# Altium PCB DebugBoard.PcbDoc
Units mm, origin at the board's own origin, x right, y up, seen from the top; angles counter-clockwise.
Board outline 46 x 38.5 mm, 4 copper layers (Top Layer, Ground 1, Ground 2, Bottom Layer), stack 2.12 mm thick; 26 components, 28 nets, 117 pads, 0 vias.
Unrouted connection lines stored in the file: 71.
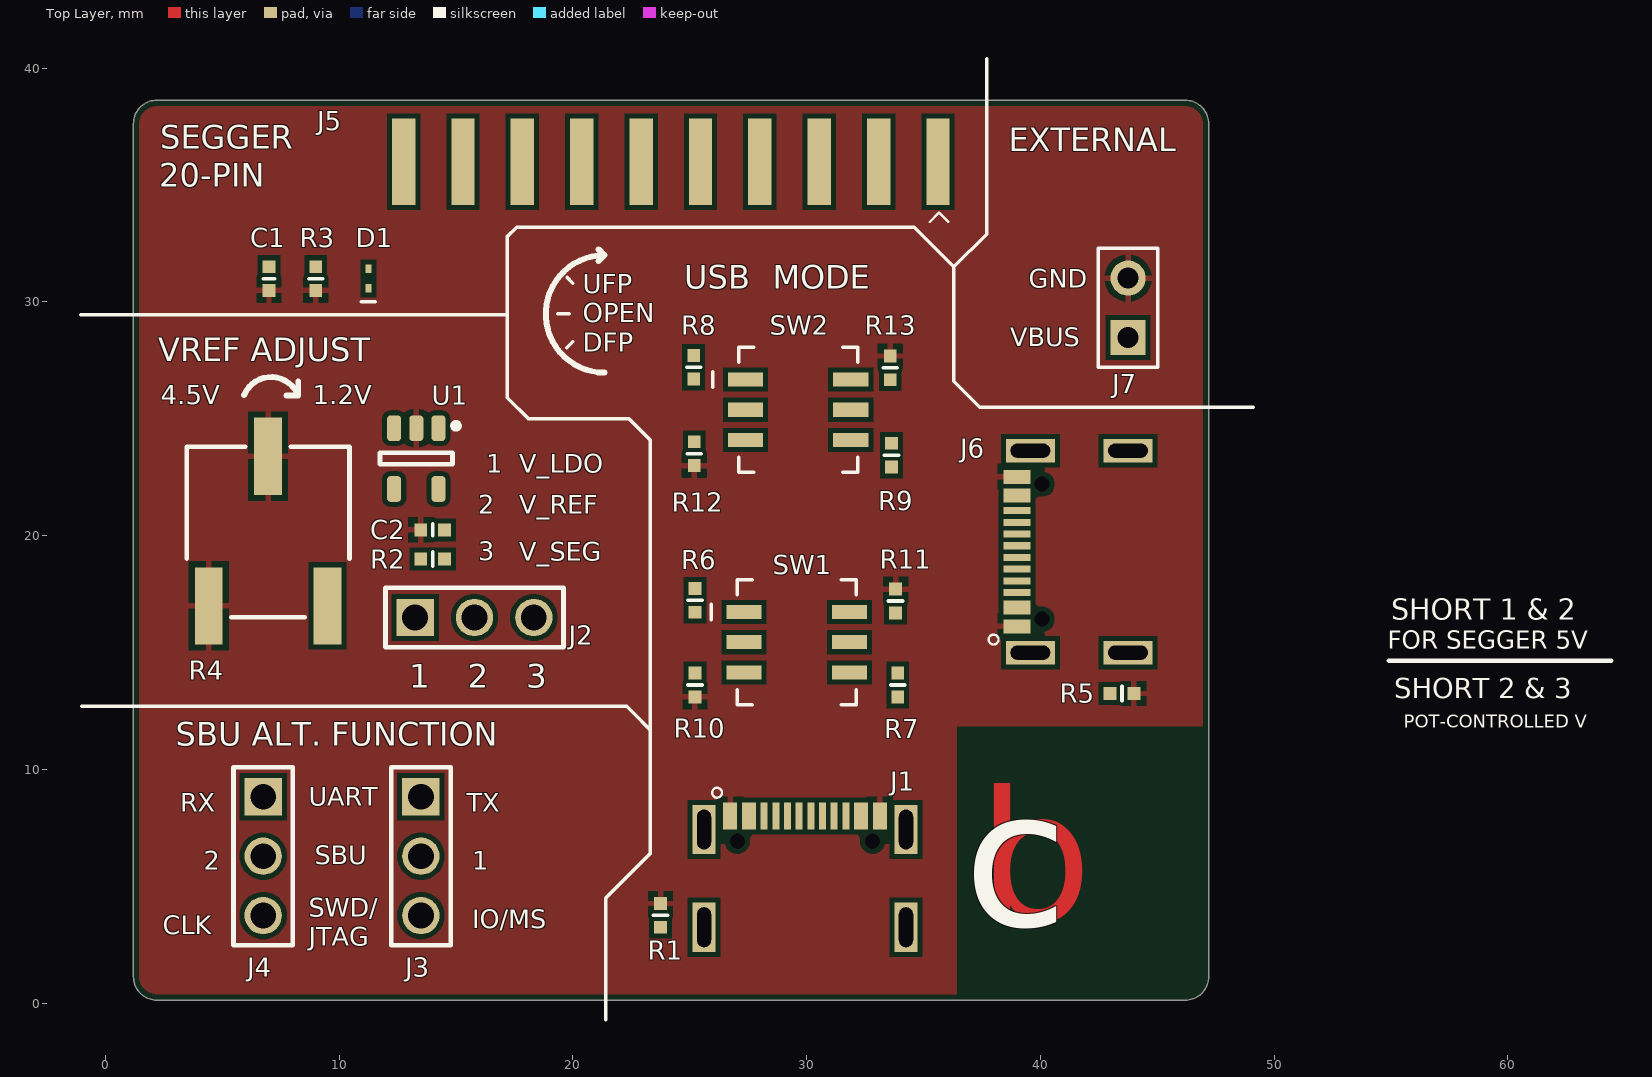
[diagram p0: Top Layer view]
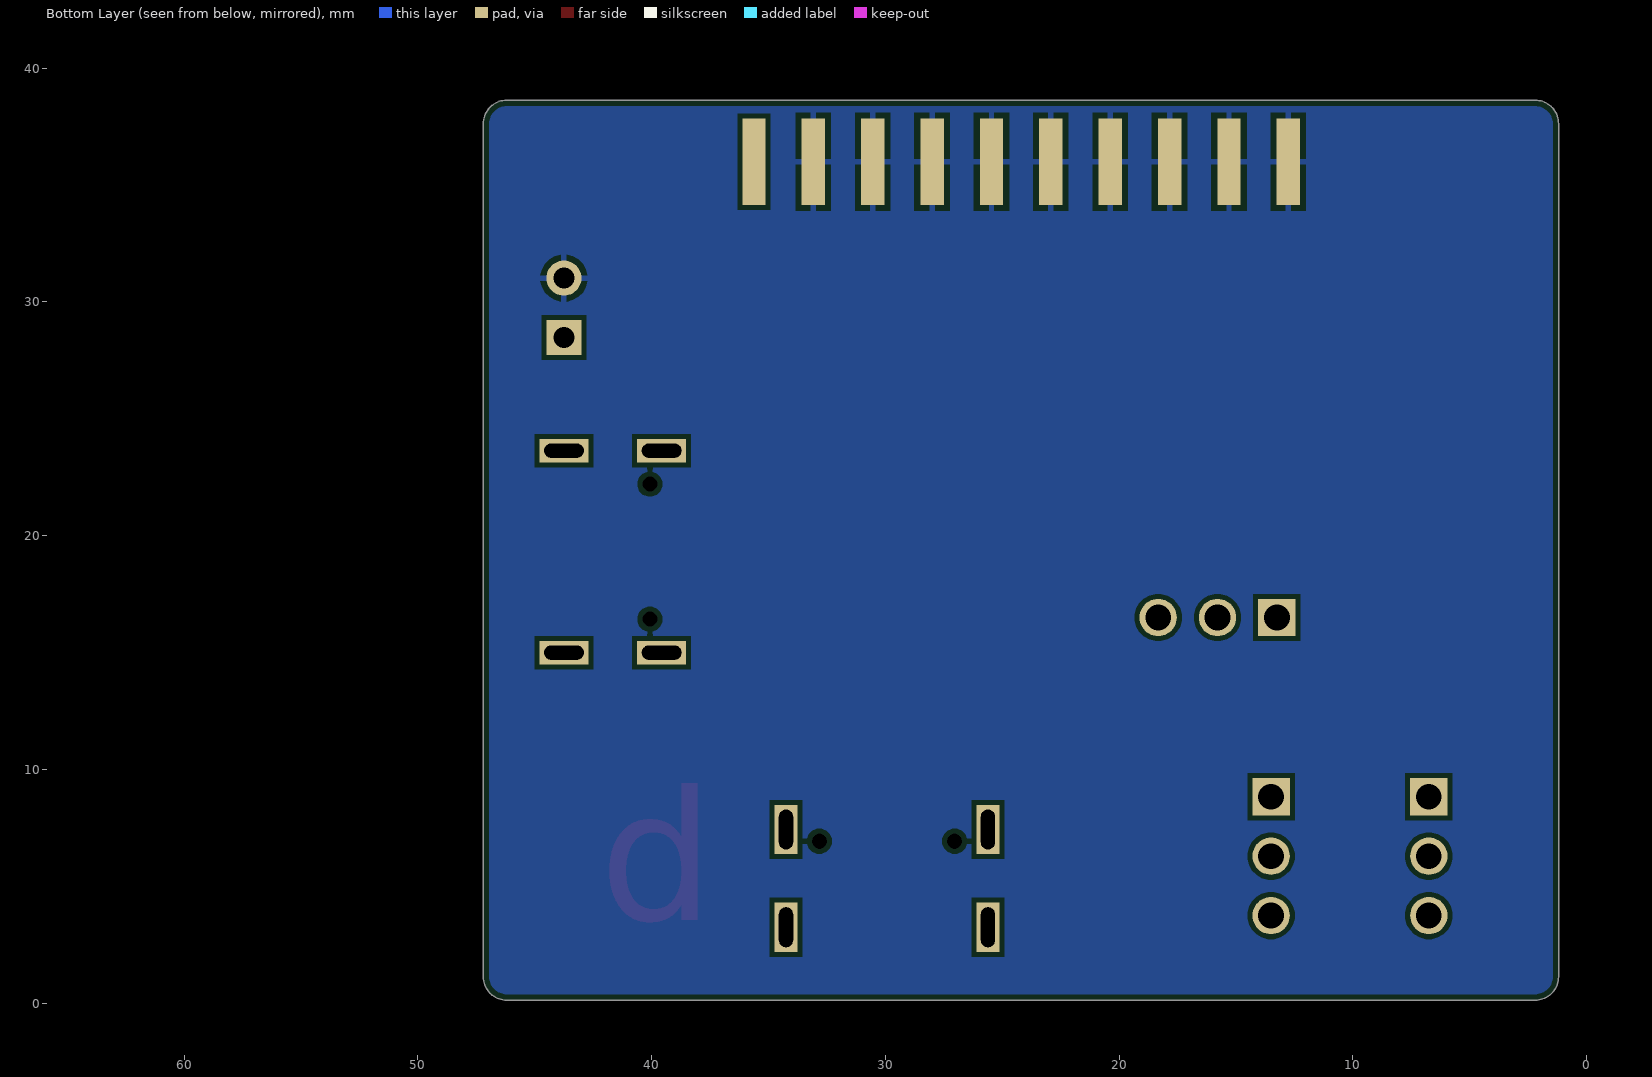
[diagram p1: Bottom Layer view, seen from below]
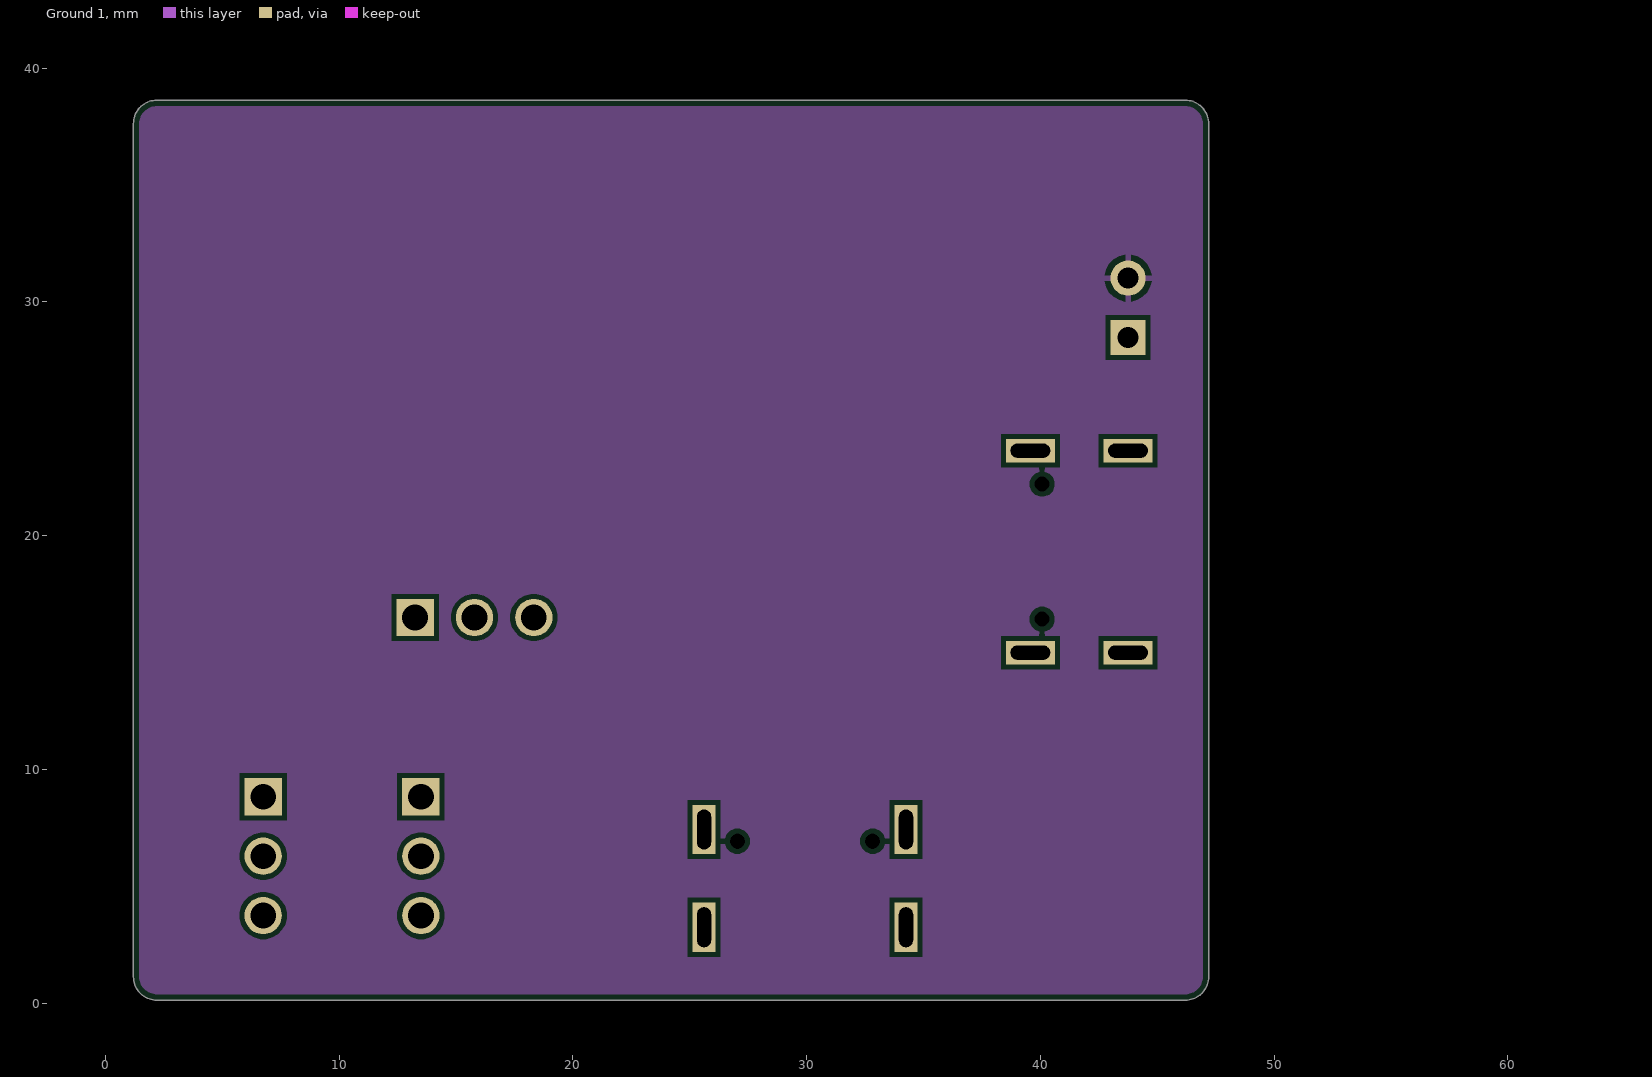
[diagram p2: Ground 1]
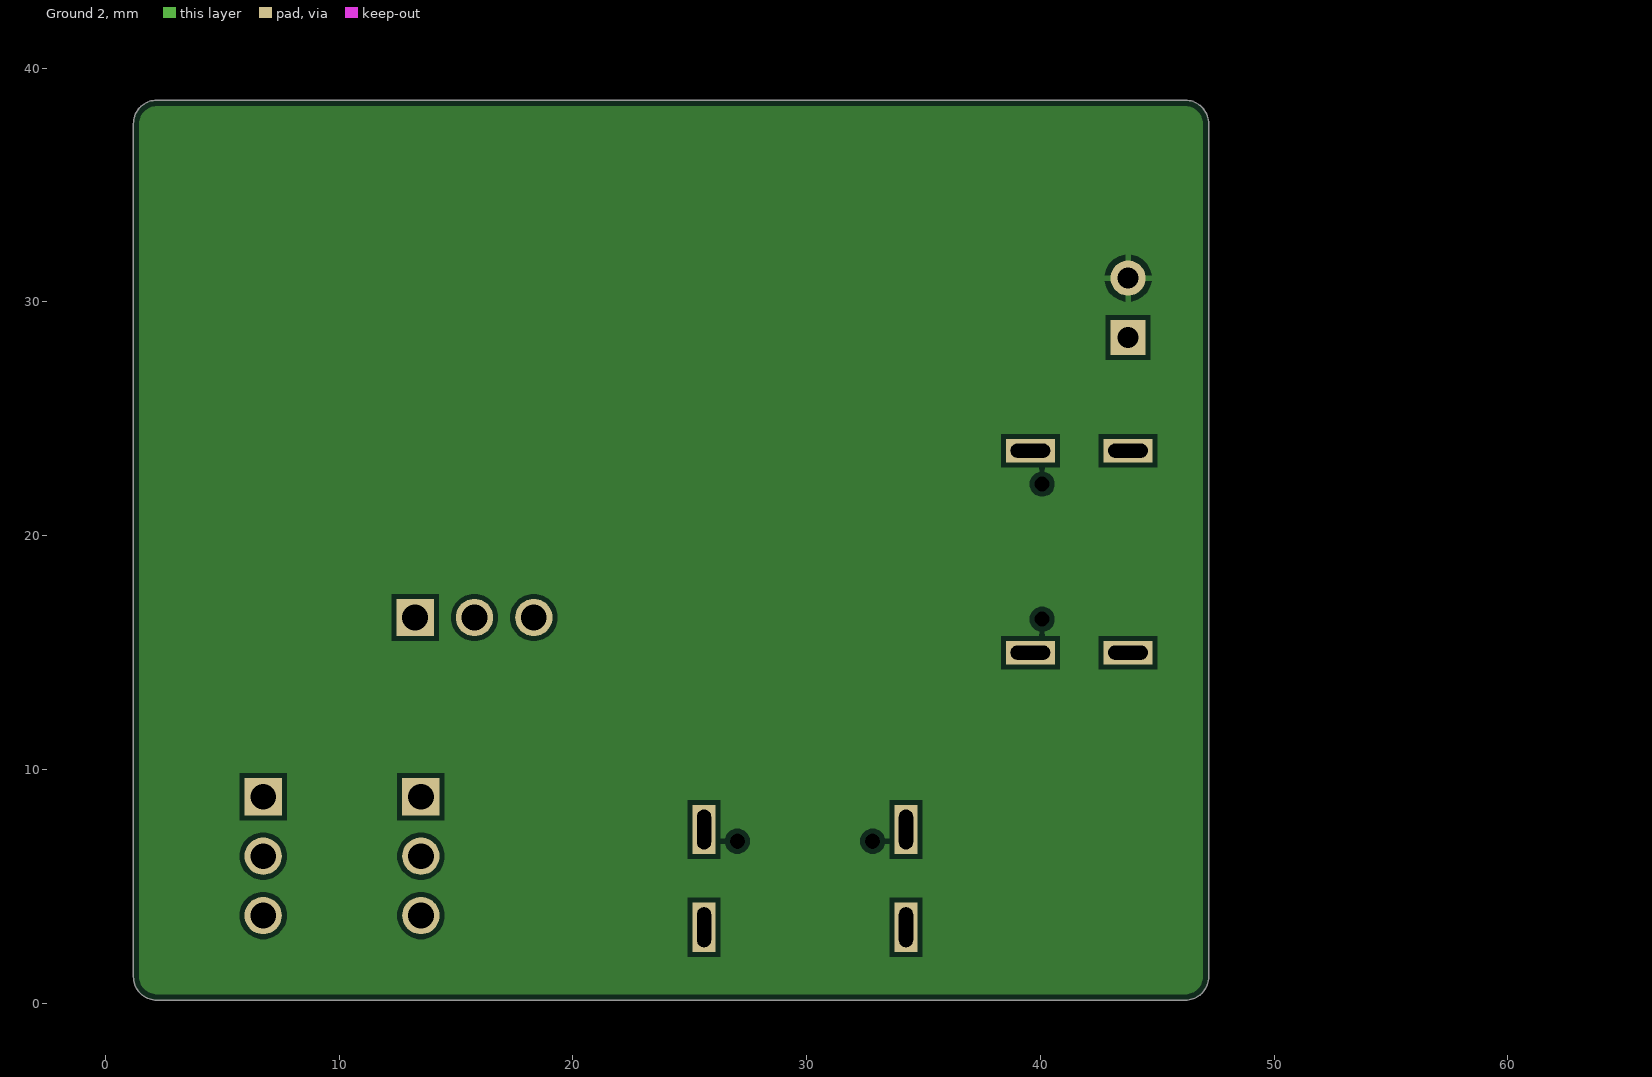
[diagram p3: Ground 2]

## Layer stack, top to bottom
Top Solder: solder mask 0.01, Solder Resist, Dk 3.5
Top Layer: signal copper 0.036
Dielectric 2: prepreg 0.1, PP-006, Dk 4.1
Ground 1: signal copper 0.036
Dielectric 1: dielectric 1.776, FR-4, Dk 4.8
Ground 2: signal copper 0.036
Dielectric 3: prepreg 0.1, PP-006, Dk 4.1
Bottom Layer: signal copper 0.036
Bottom Solder: solder mask 0.01, Solder Resist, Dk 3.5

## Board outline
1.2,1.13 1.2,37.63 cw(c2.2,37.63) 2.2,38.63 46.2,38.63 cw(c46.2,37.63) 47.2,37.63 47.2,1.13 cw(c46.2,1.13) 46.2,0.13 2.2,0.13 cw(c2.2,1.13)

## Design rules (kind name [scope] priority, off if disabled: settings)
BoardOutlineClearance [All] p1: gap=0.254 ignorepadtopadclearanceinfootprint=FALSE
Clearance Clearance_1 [InNet('D_N') vs InNet('D_P')] p1: gap=0.127 ignorepadtopadclearanceinfootprint=TRUE
Clearance [All] p2: gap=0.204 ignorepadtopadclearanceinfootprint=TRUE except(0.2: SMDPad-SMDPad)
DiffPairsRouting [All] p1: maxlimit=0.254 minlimit=0.064 mostfreqgap=0.127 toplayer_minwidth=0.178 toplayer_maxwidth=0.457 toplayer_prefwidth=0.457 midlayer1_minwidth=0.381 midlayer1_maxwidth=0.381 midlayer1_prefwidth=0.381 midlayer2_minwidth=0.381 midlayer2_maxwidth=0.381 midlayer2_prefwidth=0.381 bottomlayer_minwidth=0.178 bottomlayer_maxwidth=0.457 bottomlayer_prefwidth=0.457 impedanceprofiledriven=TRUE maxuncoupledlength=12.7
HoleSize [All] p1: absolutevalues=TRUE maxlimit=5 minlimit=0.153 maxpercent=80.000 minpercent=20.000
MinimumSolderMaskSliver [All] p1: minsoldermaskwidth=0.025
PolygonConnect [All] p1: thpad.connectstyle=Relief thpad.reliefconductorwidth=0.254 thpad.reliefentries=4 thpad.polygonreliefangle="90 Angle" thpad.airgapwidth=0.254 smdpad.connectstyle=Relief smdpad.reliefconductorwidth=0.254 smdpad.reliefentries=4 smdpad.polygonreliefangle="90 Angle" smdpad.airgapwidth=0.254 via.connectstyle=Direct via.reliefconductorwidth=0.254 via.reliefentries=4 via.polygonreliefangle="90 Angle" via.airgapwidth=0.254
RoutingVias [All] p1: holewidth=0.305 width=0.61 viastyle="Through Hole" minholewidth=0.254 minwidth=0.508 maxholewidth=0.5 maxwidth=1.27
SilkToSolderMaskClearance [IsPad] p1: minsilkscreentomaskgap=0.025 clearancetoexposedcopper=TRUE
SolderMaskExpansion [All] p1: expansion=0.102 istentingtop=FALSE
SupplyNets "Schematic Supply Nets" [InNet('VBUS')] p1: voltage=0.000
SupplyNets "Schematic Supply Nets_5" [InNet('V_DUTVREF')] p2: voltage=0.000
SupplyNets "Schematic Supply Nets_4" [InNet('V_FAKEVREF')] p3: voltage=0.000
SupplyNets "Schematic Supply Nets_3" [InNet('GND')] p4: voltage=0.000
SupplyNets "Schematic Supply Nets_1" [InNet('VSRC_SEGGER')] p5: voltage=0.000
Width [All] p1: maxlimit=25.4 minlimit=0.204 preferedwidth=0.254 midlayer1_maxwidth=0.254 midlayer2_maxwidth=0.254 minimp=50.000000 maximp=50.000000 favimp=50.000000
26 further rules are at their usual default settings.

## Classes and differential pairs
differential pair D: +D_P -D_N

## Components (designator, comment, footprint, x,y, rotation, side; value= is the part's Value field where it differs from the comment)
C1 "0402ZD105KAT2A" CAP-0402 7,31 r90 top
C2 "0402ZD105KAT2A" CAP-0402 14,20.25 r0 top
D1 "NZ9F12VST5G" DIODE-SOD923 11.25,31 r270 top
J1 "USB4105" CONN-USBC-GCT_USB4105 29.93,8.005 r0 top
J2 "61300311121" HDR-V-1X3 15.79,16.5 r0 top
J3 "61300311121" HDR-V-1X3 13.5,6.29 r270 top
J4 "61300311121" HDR-V-1X3 6.75,6.29 r270 top
J5 "SFH11-PBPC-D10-ST-BK" HDR-V-2X10-F-2.54MM 24.19,37 r0 top
J6 "USB4105" CONN-USBC-GCT_USB4105 38.995,19.32 r90 top
J7 "61300211121" HDR-V-1X2 43.75,29.75 r90 top
R1 "RC0402FR-070RL" RES-0402 23.75,3.758 r270 top value=0Ω
R2 "RC0402FR-0710KL" RES-0402 14,19 r0 top value=10kΩ
R3 "RES-470K-0402" RES-0402 9,31 r270 top value=470kΩ
R4 "POT-ROT-100K-SMD" 3361P-1-104GLF 6.96,20.2 r0 top
R5 "RC0402FR-070RL" RES-0402 43.492,13.25 r180 top value=0Ω
R6 "ERJ2GEJ563X" RES-0402 25.222,17.233 r270 top value=56k
R7 "ERJ2GEJ563X" RES-0402 33.896,13.613 r90 top value=56k
R8 "ERJ2GEJ563X" RES-0402 25.167,27.204 r270 top value=56k
R9 "ERJ2GEJ563X" RES-0402 33.626,23.445 r90 top value=56k
R10 "ERJ2GEJ512X" RES-0402 25.222,13.613 r90 top value=5.1k
R11 "ERJ2GEJ512X" RES-0402 33.807,17.207 r270 top value=5.1k
R12 "ERJ2GEJ512X" RES-0402 25.193,23.508 r90 top value=5.1k
R13 "ERJ2GEJ512X" RES-0402 33.575,27.179 r270 top value=5.1k
SW1 "CS-4-22YTA" SW-BCD-CS-4-22YTA 29.578,15.442 r0 top
SW2 "CS-4-22YTA" SW-BCD-CS-4-22YTA 29.638,25.388 r0 top
U1 "RT9043GB" SOT-23-5 13.3,23.3 r270 top

## Footprints (in the part's own frame and the unit in brackets; to place one, negate y for a bottom-side part, rotate by r counter-clockwise, add the part's x,y. Pads: shape width x height; smd on the part's side, far side on the other; paste and mask are expansions set on the pad)
3361P-1-104GLF [mm]
  rect 1.19x3.3 smd paste+0 mask+0: 1(-2.54,-3.2) 2(0,3.2) 3(2.54,-3.2)
  silkscreen extent -3.48,-3.69 3.48,3.6, body extent -3.58,-4.95 3.58,4.95, height 0.25
CAP-0402 [mm]
  rect 0.55x0.55 smd: 1(-0.508,0) 2(0.508,0)
  silkscreen extent 0,-0.25 0,0.25, body extent -0.5,-0.25 0.5,0.25, height 0.5
CONN-USBC-GCT_USB4105 [mm]
  rect 0.6x1.15 smd: A1(-3.2,0) A4(-2.4,0) A9(2.4,0) A12(3.2,0)
  rect 0.3x1.15 smd: A5(-1.25,0) A6(-0.25,0) A7(0.25,0) A8(1.25,0) B5(1.75,0) B6(0.75,0) B7(-0.75,0) B8(-1.75,0)
  rect 1x2.1 hole 0.6 slot 1.7 at 90 deg: ME(-4.32,-4.755) ME(-4.32,-0.575) ME(4.32,-4.755) ME(4.32,-0.575)
  round 0.4 hole 0.65 unplated: ""(-2.89,-1.075) ""(2.89,-1.075)
  silkscreen extent -3.97,0.79 -3.55,1.21, body extent -4.47,-7.35 4.47,0.35, height 3.26
DIODE-SOD923 [mm]
  rect 0.36x0.25 smd: 1(0.42,0) 2(-0.42,0)
  silkscreen extent 1,-0.3 1,0.3, body extent -0.53,-0.32 0.52,0.32, height 0.43
HDR-V-1X2 [mm]
  rect 1.5x1.5 hole 0.9: 1(-1.27,0)
  round 1.5 hole 0.9: 2(1.27,0)
  silkscreen extent -2.54,-1.27 2.54,1.27, body extent -2.54,-1.27 2.54,1.27, height 8.55
HDR-V-1X3 [mm]
  rect 1.6x1.6 hole 1.1: 1(-2.54,0)
  round 1.6 hole 1.1: 2(0,0) 3(2.54,0)
  silkscreen extent -3.81,-1.27 3.81,1.27, body extent -3.81,-1.27 3.81,1.27, height 8.55
HDR-V-2X10-F-2.54MM [mm]
  rect 1x3.7 smd: 1(11.43,-1) 3(8.89,-1) 5(6.35,-1) 7(3.81,-1) 9(1.27,-1) 11(-1.27,-1) 13(-3.81,-1) 15(-6.35,-1) 17(-8.89,-1) 19(-11.43,-1)
  rect 1x3.7 smd far side: 2(11.43,-1) 4(8.89,-1) 6(6.35,-1) 8(3.81,-1) 10(1.27,-1) 12(-1.27,-1) 14(-3.81,-1) 16(-6.35,-1) 18(-8.89,-1) 20(-11.43,-1)
  silkscreen extent 11.08,-3.58 11.88,-3.18, body extent -15.16,-1.8 15.16,9.9, height 3.04
RES-0402 [mm]
  rect 0.55x0.55 smd: 1(-0.508,0) 2(0.508,0)
  silkscreen extent 0,-0.3 0,0.3, body extent -0.58,-0.27 0.57,0.27, height 0.41
SOT-23-5 [mm] "SOT23-5, 5pin, 3mm x 3mm, 0.95 pitch"
  rrect50% 1.1x0.6 smd: 1(-1.3,0.95) 2(-1.3,0) 3(-1.3,-0.95) 4(1.3,-0.95) 5(1.3,0.95)
  silkscreen extent -1.52,-1.55 0.25,1.83, body extent -1.23,-1.5 1.27,1.5, height 1.1
SW-BCD-CS-4-22YTA [mm] "DPDT Rotary Switch"
  rect 1.5x0.6 smd: 1(-2.25,1.3) 2(-2.25,0) 3(-2.25,-1.3) 4(2.25,1.3) 5(2.25,0) 6(2.25,-1.3)
  silkscreen extent -3.66,-2.67 2.54,2.67, body extent -2.6,-2.5 2.6,2.5, height 2.32

## Part data
C1 C2: library part CAP-1uF-10V-0402, "AVX - 0402ZD105KAT2A - SMD Multilayer Ceramic Capacitor, 1 µF, 10 V, 0402 [1005 Metric], ± 10%, X5R, AVX 0402 MLCC", Capacitance=1uF, Case Code (Imperial)=0402, Case Code (Metric)=1005, Dielectric=X5R, Dielectric Material=Ceramic, Manufacturer 1="Kyocera AVX", Max Operating Temperature=85°C, Min Operating Temperature=-55°C, Package Quantity=1, Supplier Part Number 1=478-4596-1-ND, Tolerance=10%, Voltage=10V, Case/Package=0402, Category="Ceramic Capacitors", ComponentLink1Description=https://datasheet.ciiva.com/151/cx5r-151901.pdf?src-supplier=Digi-Key, ComponentLink1URL=https://datasheet.ciiva.com/151/cx5r-151901.pdf?src-supplier=Digi-Key, ComponentLink2Description=https://datasheet.ciiva.com/151/cx5r-151902.pdf?src-supplier=Digi-Key, ComponentLink2URL=https://datasheet.ciiva.com/151/cx5r-151902.pdf?src-supplier=Digi-Key, ComponentLink3Description=https://datasheet.ciiva.com/151/cx5r-151903.pdf?src-supplier=Digi-Key, ComponentLink3URL=https://datasheet.ciiva.com/151/cx5r-151903.pdf?src-supplier=Digi-Key, ComponentLink4Description=https://datasheet.ciiva.com/11464/cx5r-11464568.pdf?src-supplier=Avnet, ComponentLink4URL=https://datasheet.ciiva.com/11464/cx5r-11464568.pdf?src-supplier=Avnet, ComponentLink5Description=https://datasheet.ciiva.com/6159/lt-6159749.pdf?src-supplier=Farnell, ComponentLink5URL=https://datasheet.ciiva.com/6159/lt-6159749.pdf?src-supplier=Farnell, ComponentLink6Description=https://datasheet.ciiva.com/1124/1666675-1124066.pdf?src-supplier=Element14, ComponentLink6URL=https://datasheet.ciiva.com/1124/1666675-1124066.pdf?src-supplier=Element14, ComponentLink7Description=https://datasheet.ciiva.com/1124/1666675-1124067.pdf?src-supplier=Element14, ComponentLink7URL=https://datasheet.ciiva.com/1124/1666675-1124067.pdf?src-supplier=Element14, ComponentLink8Description=https://datasheet.ciiva.com/16448/cx5r-16448997.pdf?src-supplier=Future+Electronics, ComponentLink8URL=https://datasheet.ciiva.com/16448/cx5r-16448997.pdf?src-supplier=Future+Electronics, Construction=Flat, Contact Plating=Tin,Matte, Depth=0.5mm, Height=0.56mm, Lead Free="Lead Free", Lead Pitch=5.08mm, Length=1mm, Manufacturer Part Number 1=0402ZD105KAT2A, Mount="Surface Mount", Packaging="Cut Tape", Pricing 1="1=0.12000, 10=0.08800, 50=0.05000, 100=0.04140, 500=0.02900, 1000=0.02401, 2500=0.02235, 5000=0.02045 (USD)", Radiation Hardening=No, REACH SVHC="No SVHC", RoHS=Yes, RoHS Compliant=Yes, Series=-, Stock 1=2474650, Supplier 1=Digi-Key, Termination=SMD/SMT, Thickness=0.022inch, Voltage Rating=10V, Voltage Rating (DC)=10V, Width=0.02inch
D1: library part DIODE-ZNR-12V-SOD923, "DIODE ZENER 12V 200MW SOD923", Case/Package=SOD-923-2, Manufacturer 1="ON Semiconductor", Max Operating Temperature=150°C, Max Power Dissipation=200mW, Max Reverse Leakage Current=100nA, Min Operating Temperature=-65°C, Package Quantity=8000, Test Current=5mA, Tolerance=2%, Zener Voltage=12V, Category="Zener Diodes", ComponentLink1Description=https://datasheet.ciiva.com/900/nz9f2v4s-d-900335.pdf?src-supplier=Digi-Key, ComponentLink1URL=https://datasheet.ciiva.com/900/nz9f2v4s-d-900335.pdf?src-supplier=Digi-Key, ComponentLink2Description=https://datasheet.ciiva.com/10639/nz9f2v4s-d-10639037.pdf?src-supplier=Avnet, ComponentLink2URL=https://datasheet.ciiva.com/10639/nz9f2v4s-d-10639037.pdf?src-supplier=Avnet, ComponentLink3Description=https://datasheet.ciiva.com/13082/nz9f2v4s-d-13082447.pdf?src-supplier=Mouser, ComponentLink3URL=https://datasheet.ciiva.com/13082/nz9f2v4s-d-13082447.pdf?src-supplier=Mouser, Element Configuration=Single, Impedance=30R, Lead Free="Lead Free", Manufacturer Part Number 1=NZ9F12VST5G, Number of Pins=2, Packaging="Tape and Reel", Power Dissipation=200mW, Pricing 1="5953=0.05964, 6000=0.05880, 12000=0.05712, 30000=0.05586, 60000=0.05376, 300000=0.05250, 600000=0.05124 (USD)", Radiation Hardening=No, RoHS=Yes, RoHS Compliant=Yes, Stock 1=4479650, Supplier 1=Avnet, Supplier Part Number 1=NZ9F12VST5G, Voltage Tolerance=2%
J1 J6: library part CONN-F-USB-C-GCT_USB4105, "Usb Conn, 2.0 Type C, Rcpt, 16Pos, Smt Rohs Compliant: Yes", Manufacturer 1="Global Connector Technology", Manufacturer Part Number 1=USB4105-GF-A, Supplier Part Number 1=86AH2021, Pricing 1="1=0.85100, 10=0.69300, 25=0.63100, 50=0.58700, 100=0.54000 (USD)", RoHS=No, Stock 1=1960, Supplier 1=Newark
J2 J3 J4: library part HDR-V-1X3-M, "Header, 3-Pin, 0.1\"", Colour=Black, Manufacturer="Wurth Electronics", Supplier Part Number 1=732-5316-ND, ComponentLink1Description=http://www.farnell.com/cad/1737268.pdf, ComponentLink1URL=http://www.farnell.com/cad/1737268.pdf, ComponentLink2Description=http://katalog.we-online.de/em/datasheet/6130xx11121.pdf, ComponentLink2URL=http://katalog.we-online.de/em/datasheet/6130xx11121.pdf, Connector Type="Male Pin", Contact Material=Copper, Contact Mating Length=0.236inch, Contact Plating=Gold, Gender=Male, LatestRevisionDate=17-Jul-2002, LatestRevisionNote="Re-released for DXP Platform.", Lead Free="Lead Free", Manufacturer 1="Wurth Electronics", Manufacturer Part Number 1=61300311121, Mount="Through Hole", MPN=61300311121, Number of Contacts=3, Number of Positions=3, Number of Rows=1, Packaging=Bulk, Pitch=0.1inch, Pricing 1="1=0.13, 10=0.106, 25=0.088, 50=0.074, 100=0.067, 1000=0.061 (USD)", Publisher="Altium Limited", REACH SVHC=Unknown, Stock 1=41782, Supplier 1=Digi-Key, Termination=Solder
J5: library part HDR-V-2X10-F-2.54MM, "20 Position Header Connector 0.100\" (2.54mm) Through Hole Gold", Color=Black, Manufacturer 1=Sullins, Package Quantity=1, Supplier Part Number 1=S9197-ND, Category="Headers and Wire Housings", ComponentLink1Description=https://datasheet.ciiva.com/754/sfh11-pxxc-dxx-st-xx11160-c-754558.pdf?src-supplier=Digi-Key, ComponentLink1URL=https://datasheet.ciiva.com/754/sfh11-pxxc-dxx-st-xx11160-c-754558.pdf?src-supplier=Digi-Key, Connector Type=Header, Contact Plating=Gold, Contact Type="Female Socket", Lead Free="Lead Free", Manufacturer Part Number 1=SFH11-PBPC-D10-ST-BK, Mount="Through Hole", Number of Positions=20, Number of Rows=2, Packaging=Tray, Pitch=0.1inch, Pricing 1="1=1.15000, 10=0.96800, 80=0.86925, 440=0.71118, 1000=0.63216, 5000=0.57070 (USD)", RoHS=Yes, RoHS Compliant=Yes, Row Spacing=0.1inch, Series=SFH11, Stock 1=51703, Supplier 1=Digi-Key, Termination=Solder
J7: library part HDR-V-1X2-M, "Header, 2-Pin, 0.1\"", Colour=Black, Current Rating=3A, Manufacturer="Wurth Electronics", Max Operating Temperature=125°C, Min Operating Temperature=-40°C, Supplier Part Number 1=732-5315-ND, Voltage Rating=250V, ComponentLink1Description=https://datasheet.ciiva.com/13619/6130xx11121-48870-13619345.pdf, ComponentLink1URL=https://datasheet.ciiva.com/13619/6130xx11121-48870-13619345.pdf, Connector Type="Male Pin", Contact Gender=Male, Contact Material="Copper,Copper Alloy", Contact Mating Length=0.236inch, Contact Plating=Gold, Gender=Male, Housing Material=PBT, LatestRevisionDate=17-Jul-2002, LatestRevisionNote="Re-released for DXP Platform.", Lead Free="Lead Free", Manufacturer 1="Wurth Electronics", Manufacturer Part Number 1=61300211121, Mount="Through Hole", MPN=61300211121, Number of Contacts=2, Number of Positions=2, Number of Rows=1, Packaging=Bulk, Pitch=0.1inch, Pricing 1="1=0.13, 10=0.106, 25=0.088, 50=0.074, 100=0.067, 1000=0.061 (USD)", Publisher="Altium Limited", REACH SVHC=Unknown, Stock 1=88010, Supplier 1=Digi-Key, Termination="Through Hole"
R1 R5: library part RES-0-0402, "RES 0 OHM JUMPER 1/16W 0402", Manufacturer=Yageo, Max Operating Temperature=155°C, Min Operating Temperature=-55°C, Package Shape=Rectangular, Rated Power Dissipation (P)=62.5mW, Rated Temperature=70°C, Resistance=0R, Resistor Type="FIXED RESISTOR", Supplier Part Number 1=311-0.0LRTR-ND, Tolerance=Jumper, Category="Chip SMD Resistors", ComponentLink1Description=https://datasheet.ciiva.com:443/pdfs/VipMasterIC/IC/YAGO/YAGOS02562/YAGOS02562-1.pdf?src-supplier=IHS+Markit, ComponentLink1URL=https://datasheet.ciiva.com:443/pdfs/VipMasterIC/IC/YAGO/YAGOS02562/YAGOS02562-1.pdf?src-supplier=IHS+Markit, ComponentLink2Description=https://datasheet.ciiva.com/8896/pyu-rc0402-51-rohs-l-6-8896149.pdf?src-supplier=Avnet, ComponentLink2URL=https://datasheet.ciiva.com/8896/pyu-rc0402-51-rohs-l-6-8896149.pdf?src-supplier=Avnet, ComponentLink3Description=https://datasheet.ciiva.com/16790/pyu-rc0402-51-rohs-l-6-r-16790444.pdf?src-supplier=Future+Electronics, ComponentLink3URL=https://datasheet.ciiva.com/16790/pyu-rc0402-51-rohs-l-6-r-16790444.pdf?src-supplier=Future+Electronics, ComponentLink4Description=https://datasheet.ciiva.com/28419/pyu-rc0402-51-rohs-l-6-28419661.pdf?src-supplier=Avnet+Europe, ComponentLink4URL=https://datasheet.ciiva.com/28419/pyu-rc0402-51-rohs-l-6-28419661.pdf?src-supplier=Avnet+Europe, ComponentLink5Description=https://datasheet.ciiva.com/16869/pyu-rc0402-51-rohs-l-6-16869518.pdf?src-supplier=Avnet+Europe, ComponentLink5URL=https://datasheet.ciiva.com/16869/pyu-rc0402-51-rohs-l-6-16869518.pdf?src-supplier=Avnet+Europe, JESD-609 Code=e3, Manufacturer 1=Yageo, Manufacturer Part Number=RC0402FR-070RL, Manufacturer Part Number 1=RC0402FR-070RL, Manufacturer_PN=RC0402FR-070RL, Mount="Surface Mount", Number of Pins=2, Packaging="Tape and Reel", Pricing 1="10000=0.00132, 30000=0.00116, 50000=0.00109 (USD)", REACH SVHC=Yes, RoHS=Yes, RoHS Compliant=Yes, Size Code=0402, Stock 1=2669862, Supplier 1=Digi-Key, Technology="METAL GLAZE/THICK FILM", Terminal Finish=Nickel, Termination=Wraparound
R2: library part RES-10K-0402, "RES SMD 10K OHM 1% 1/16W 0402", Case Code (Imperial)=0402, Case Code (Metric)=1005, Manufacturer 1=Yageo, Max Operating Temperature=155°C, Min Operating Temperature=-55°C, Power Rating=62.5mW, Resistance=10kR, Supplier Part Number 1=311-10.0KLRCT-ND, Temperature Coefficient=100ppm/°C, Tolerance=±1%, Voltage Rating=50V, Case/Package=0402, ComponentLink1Description=https://datasheet.ciiva.com/7660/38568-7660787.pdf?src-supplier=Element14, ComponentLink1URL=https://datasheet.ciiva.com/7660/38568-7660787.pdf?src-supplier=Element14, ComponentLink2Description=https://datasheet.ciiva.com/7849/1784430-7849813.pdf?src-supplier=Element14, ComponentLink2URL=https://datasheet.ciiva.com/7849/1784430-7849813.pdf?src-supplier=Element14, ComponentLink3Description=https://datasheet.ciiva.com/7849/1686128-7849814.pdf?src-supplier=Element14, ComponentLink3URL=https://datasheet.ciiva.com/7849/1686128-7849814.pdf?src-supplier=Element14, ComponentLink4Description=https://datasheet.ciiva.com/7849/1784430-7849815.pdf?src-supplier=Element14, ComponentLink4URL=https://datasheet.ciiva.com/7849/1784430-7849815.pdf?src-supplier=Element14, ComponentLink5Description=https://datasheet.ciiva.com/22747/1018594-22747512.pdf?src-supplier=Element14, ComponentLink5URL=https://datasheet.ciiva.com/22747/1018594-22747512.pdf?src-supplier=Element14, ComponentLink6Description=https://datasheet.ciiva.com/12667/pyu-rc0402-51-rohs-l-6-r-12667067.pdf?src-supplier=Mouser, ComponentLink6URL=https://datasheet.ciiva.com/12667/pyu-rc0402-51-rohs-l-6-r-12667067.pdf?src-supplier=Mouser, ComponentLink7Description=https://datasheet.ciiva.com/7983/1018594-7983486.pdf?src-supplier=Element14, ComponentLink7URL=https://datasheet.ciiva.com/7983/1018594-7983486.pdf?src-supplier=Element14, Composition="Thick Film", Depth=0.5mm, Height=0.32mm, Lead Free="Lead Free", Lead Pitch=0.2mm, Length=1mm, Manufacturer Part Number 1=RC0402FR-0710KL, Military Standard=Not, Number of Pins=2, Number of Terminations=2, Packaging="Tape and Reel", Pricing 1="1=0.10000, 10=0.01500, 100=0.00600, 1000=0.00270, 2500=0.00235, 5000=0.00194 (USD)", REACH SVHC="No SVHC", RoHS=Yes, Stock 1=64327699, Supplier 1=Digi-Key, Termination=SMD/SMT, Voltage Rating (DC)=50V, Width=0.5mm, Working Voltage=50V
R3: library part CMP-041-000094-1, "RES SMD 470K OHM 1% 1/16W 0402", Case Code (Imperial)=0402, Case Code (Metric)=1005, Manufacturer 1=Yageo, Manufacturer Part Number 1=RC0402FR-07470KL, Max Operating Temperature=155°C, Max Power Dissipation=63mW, Min Operating Temperature=-55°C, Package Quantity=1, Power Rating=62.5mW, Resistance=470kR, Resistance Tolerance=1%, Resistor Type="Thick Film", Temperature Coefficient=100ppm/°C, Voltage Rating=50V, Case/Package=0402, Category="Chip SMD Resistors", ComponentLink1Description=https://datasheet.ciiva.com/11819/0900766b80c66297-11819514.pdf?src-supplier=RSComponents, ComponentLink1URL=https://datasheet.ciiva.com/11819/0900766b80c66297-11819514.pdf?src-supplier=RSComponents, ComponentLink2Description=https://datasheet.ciiva.com/2453/pyu-r-int-thick-7-2453433.pdf?src-supplier=Digi-Key, ComponentLink2URL=https://datasheet.ciiva.com/2453/pyu-r-int-thick-7-2453433.pdf?src-supplier=Digi-Key, ComponentLink3Description=https://datasheet.ciiva.com/2453/pyu-r-int-thick-7-2453434.pdf?src-supplier=Digi-Key, ComponentLink3URL=https://datasheet.ciiva.com/2453/pyu-r-int-thick-7-2453434.pdf?src-supplier=Digi-Key, ComponentLink4Description=https://datasheet.ciiva.com/2453/pyu-r-int-thick-7-2453435.pdf?src-supplier=Digi-Key, ComponentLink4URL=https://datasheet.ciiva.com/2453/pyu-r-int-thick-7-2453435.pdf?src-supplier=Digi-Key, ComponentLink5Description=https://datasheet.ciiva.com/15189/getdatasheetpartid-325138-15189462.pdf?src-supplier=Verical, ComponentLink5URL=https://datasheet.ciiva.com/15189/getdatasheetpartid-325138-15189462.pdf?src-supplier=Verical, ComponentLink6Description=https://datasheet.ciiva.com/46412/1018594-46412837.pdf?src-supplier=Element14, ComponentLink6URL=https://datasheet.ciiva.com/46412/1018594-46412837.pdf?src-supplier=Element14, ComponentLink7Description=https://datasheet.ciiva.com/7850/1018594-7850012.pdf?src-supplier=Element14, ComponentLink7URL=https://datasheet.ciiva.com/7850/1018594-7850012.pdf?src-supplier=Element14, ComponentLink8Description=https://datasheet.ciiva.com/7850/1018594-7850013.pdf?src-supplier=Element14, ComponentLink8URL=https://datasheet.ciiva.com/7850/1018594-7850013.pdf?src-supplier=Element14, Construction=Rectangular, Depth=0.5mm, Design Item ID=RES-470K-0402, Features="Moisture Resistant", Height=0.016inch, Lead Free="Lead Free", Length=1mm, Military Standard=Not, Number of Pins=2, Number of Terminations=2, Packaging="Tape and Reel", Pricing 1="1=0.10000, 10=0.01600, 100=0.00660, 1000=0.00299, 2500=0.00259, 5000=0.00214 (USD)", REACH SVHC="No SVHC", RoHS=Yes, RoHS Compliant=Yes, Series=RC, Size Code=0402, Source=resistors.SchLib, Stock 1=112236, Technology="THICK FILM", Termination=SMD/SMT, Tolerance=1%, Voltage Rating (DC)=50V, Width=0.02inch
R4: "TRIMMER 100K OHM 0.5W GW TOP ADJ", Manufacturer 1="Bourns Inc.", Manufacturer Part Number 1=3361P-1-104GLF, ComponentLink1Description=Datasheet, ComponentLink1URL=https://www.bourns.com/docs/Product-Datasheets/3361.pdf
R6 R7 R8 R9: library part RES-56K-0402-5%, "RES SMD 56K OHM 5% 1/10W 0402", Case Code (Imperial)=0402, Case Code (Metric)=1005, Manufacturer=Panasonic, Max Operating Temperature=155°C, Max Power Dissipation=100mW, Min Operating Temperature=-55°C, Package Quantity=10000, Resistance=56kR, Supplier Part Number 1=P56KJCT-ND, Temperature Coefficient=200ppm/°C, Tolerance=±5%, Voltage Rating=50V, Case/Package=0402, ComponentLink1Description=https://datasheet.ciiva.com/11821/0900766b80f806dd-11821353.pdf?src-supplier=RSComponents, ComponentLink1URL=https://datasheet.ciiva.com/11821/0900766b80f806dd-11821353.pdf?src-supplier=RSComponents, ComponentLink2Description=https://datasheet.ciiva.com/46377/1500035-46377371.pdf?src-supplier=Element14, ComponentLink2URL=https://datasheet.ciiva.com/46377/1500035-46377371.pdf?src-supplier=Element14, ComponentLink3Description=https://datasheet.ciiva.com/46389/1500035-46389069.pdf?src-supplier=Element14, ComponentLink3URL=https://datasheet.ciiva.com/46389/1500035-46389069.pdf?src-supplier=Element14, ComponentLink4Description=https://datasheet.ciiva.com/30184/4aoa0000ce1-30184118.pdf?src-supplier=Onlinecomponents.com, ComponentLink4URL=https://datasheet.ciiva.com/30184/4aoa0000ce1-30184118.pdf?src-supplier=Onlinecomponents.com, ComponentLink5Description=https://datasheet.ciiva.com/24159/aoa0000ce1-37422-24159031.pdf?src-supplier=Mouser, ComponentLink5URL=https://datasheet.ciiva.com/24159/aoa0000ce1-37422-24159031.pdf?src-supplier=Mouser, ComponentLink6Description=https://datasheet.ciiva.com/9188/aoa0000ce1-9188716.pdf?src-supplier=Avnet, ComponentLink6URL=https://datasheet.ciiva.com/9188/aoa0000ce1-9188716.pdf?src-supplier=Avnet, ComponentLink7Description=https://datasheet.ciiva.com/16769/70260739-16769566.pdf?src-supplier=Allied+Electronics, ComponentLink7URL=https://datasheet.ciiva.com/16769/70260739-16769566.pdf?src-supplier=Allied+Electronics, ComponentLink8Description=https://datasheet.ciiva.com/43460/1500035-43460399.pdf?src-supplier=Farnell, ComponentLink8URL=https://datasheet.ciiva.com/43460/1500035-43460399.pdf?src-supplier=Farnell, Composition="Thick Film", Contact Plating=Tin, Depth=0.5mm, Height=0.35mm, Lead Free="Lead Free", Length=1mm, Manufacturer Part Number=ERJ2GEJ563X, Military Standard=Not, Mount="Surface Mount", Number of Terminations=2, Packaging="Tape and Reel", Power Rating=100mW, Pricing 1="1 = 0.10000, 10 = 0.03100, 100 = 0.01250, 1000 = 0.00560, 2500 = 0.00486, 5000 = 0.00401 (USD)", REACH SVHC="No SVHC", RoHS=Yes, Stock 1=167786, Supplier 1=Digi-Key, Termination=SMD/SMT, Voltage Rating (DC)=50V, Weight=2.8E-05oz, Width=0.5mm
R10 R11 R12 R13: library part RES-5.1K-0402, "RES SMD 5.1K OHM 5% 1/10W 0402", Case Code (Imperial)=0402, Case Code (Metric)=1005, Manufacturer 1=Panasonic, Max Operating Temperature=155°C, Max Power Dissipation=100mW, Min Operating Temperature=-55°C, Package Quantity=1, Resistance=5.1kR, Supplier Part Number 1=P5.1KJCT-ND, Temperature Coefficient=200ppm/°C, Tolerance=±5%, Voltage Rating=50V, Case/Package=0402, ComponentLink1Description=https://datasheet.ciiva.com/11821/0900766b80f806dd-11821350.pdf?src-supplier=RSComponents, ComponentLink1URL=https://datasheet.ciiva.com/11821/0900766b80f806dd-11821350.pdf?src-supplier=RSComponents, ComponentLink2Description=https://datasheet.ciiva.com/9195/aoa0000ce1-9195574.pdf?src-supplier=Avnet, ComponentLink2URL=https://datasheet.ciiva.com/9195/aoa0000ce1-9195574.pdf?src-supplier=Avnet, ComponentLink3Description=https://datasheet.ciiva.com/16768/70260739-16768840.pdf?src-supplier=Allied+Electronics, ComponentLink3URL=https://datasheet.ciiva.com/16768/70260739-16768840.pdf?src-supplier=Allied+Electronics, ComponentLink4Description=https://datasheet.ciiva.com/46377/1500035-46377372.pdf?src-supplier=Element14, ComponentLink4URL=https://datasheet.ciiva.com/46377/1500035-46377372.pdf?src-supplier=Element14, ComponentLink5Description=https://datasheet.ciiva.com/46389/1500035-46389068.pdf?src-supplier=Element14, ComponentLink5URL=https://datasheet.ciiva.com/46389/1500035-46389068.pdf?src-supplier=Element14, ComponentLink6Description=https://datasheet.ciiva.com/30141/4aoa0000ce1-30141421.pdf?src-supplier=Onlinecomponents.com, ComponentLink6URL=https://datasheet.ciiva.com/30141/4aoa0000ce1-30141421.pdf?src-supplier=Onlinecomponents.com, Composition="Thick Film", Contact Plating=Tin, Depth=0.5mm, Height=0.35mm, Lead Free="Lead Free", Length=1mm, Manufacturer Part Number 1=ERJ2GEJ512X, Military Standard=Not, Mount="Surface Mount", Number of Terminations=2, Packaging="Tape and Reel", Power Rating=100mW, Pricing 1="1 = 0.10000, 10 = 0.03600, 100 = 0.01480, 1000 = 0.00665, 2500 = 0.00577, 5000 = 0.00477 (USD)", Radiation Hardening=No, REACH SVHC="No SVHC", RoHS=Yes, Stock 1=1595873, Supplier 1=Digi-Key, Termination=SMD/SMT, Voltage Rating (DC)=50V, Width=0.02inch
SW1 SW2: library part SW-DPDT-3P-ROTARY, "SWITCH ROTARY DIP DPDT 100MA 16V", Current Rating=100mA, Manufacturer="Nidec Copal", Max Operating Temperature=70°C, Max Voltage Rating (DC)=16V, Min Operating Temperature=-25°C, Supplier Part Number 1=563-1039-1-ND, ComponentLink1Description=https://datasheet.ciiva.com/2863/cs-4-2863719.pdf, ComponentLink1URL=https://datasheet.ciiva.com/2863/cs-4-2863719.pdf, ComponentLink2Description=https://datasheet.ciiva.com/2863/cs-4-2863720.pdf, ComponentLink2URL=https://datasheet.ciiva.com/2863/cs-4-2863720.pdf, ComponentLink3Description=https://datasheet.ciiva.com/2863/cs-4-2863721.pdf, ComponentLink3URL=https://datasheet.ciiva.com/2863/cs-4-2863721.pdf, Contact Material="Copper Alloy", Contact Plating=Gold, Electrical Life=200Cycles, Height=2.3mm, Lead Free="Lead Free", Length=0.197inch, Manufacturer 1="Nidec Copal", Manufacturer Part Number 1=CS-4-22YTA, Max Current Rating=100mA, Mount="Surface Mount", MPN=CS-4-22YTA, Number of Positions=2, Orientation=Vertical, Packaging="Tape and Reel", Pitch=0.051inch, Stock 1=0, Supplier 1=Digi-Key, Termination=J-Hook, Throw Configuration=DPDT, Voltage Rating (DC)=16V, Washable=Yes, Width=4.5mm
U1: library part IC-PWR-LDO-RT9043GB, "IC REG LINEAR 3.3V 400mA SOT23-5", Manufacturer 1="Richtek USA Inc.", ComponentLink1Description=Datasheet, ComponentLink1URL=https://datasheet.ciiva.com/2046/3d3futf-83fb3frfm5mdqzltaylnbkzg3d3d3f3d-2046897.pdf?src-supplier=Digikey, Manufacturer Part Number 1=RT9043GB

## Nets (pads, with @x,y where several pads share a name; then routed paths per layer and width w, separated by ;. In a path a pad name is that pad's centre, name@x,y a point inside that pad or via, vN(x,y) a via of type N, cw(c..) or ccw(c..) an arc to the next point about the centre after c; other vN are vias at no path point)
D_N: J1.A7 J1.B7 J6.A7 J6.B7
D_P: J1.A6 J1.B6 J6.A6 J6.B6
GND: C1.1 C2.1 J1.A1 J1.A12 J5.4 J5.6 J5.8 J5.10 J5.12 J5.14 J5.16 J5.18 J5.20 J6.A1 J6.A12 J7.2 R1.1 R3.2 R4.1 R4.2 R5.1 R10.1 R11.1 R12.1 R13.1 U1.2
MAIN_CC1: J1.A5 SW1.2
MAIN_CC2: J1.B5 SW1.5
NetJ1_ME: J1.ME R1.2
NetJ6_ME: J6.ME R5.2
NetR2_1: R2.1 R4.3 U1.4
NetR6_2: R6.2 SW1.1
NetR7_2: R7.2 SW1.6
NetR8_2: R8.2 SW2.1
NetR9_2: R9.2 SW2.6
NetR10_2: R10.2 SW1.3
NetR11_2: R11.2 SW1.4
NetR12_2: R12.2 SW2.3
NetR13_2: R13.2 SW2.4
SBU1: J1.A8 J3.2
SBU2: J1.B8 J4.2
SECOND_CC1: J6.A5 SW2.2
SECOND_CC2: J6.B5 SW2.5
SWCLK/TCLK: J4.3 J5.9
SWDIO/TMS: J3.3 J5.7
UART_RX: J4.1 J5.17
UART_TX: J3.1 J5.5
V_DUTVREF: J2.2 J5.1
V_FAKEVREF: C2.2 J2.1 R2.2 U1.5
VBUS: D1.1 J1.A4 J1.A9 J6.A4 J6.A9 J7.1 R6.1 R7.1 R8.1 R9.1
VSRC_SEGGER: C1.2 D1.2 J2.3 J5.19 R3.1 U1.1 U1.3
pads on no net: J1. J5.2 J5.3 J5.11 J5.13 J5.15 J6. J6.A8 J6.B8

## Polygon pours and split planes (outlines as drawn)
GND on Bottom Layer "NONET_L-01_P-001" (solid, remove dead copper, pour order 0): 0,-0.051 0,38.721 47.587,38.721 47.587,0.013
GND on Ground 1 "NONET_L-01_P-001" (solid, pour order 2): 0,-0.013 0,38.72 47.523,38.72 47.523,0.009 -0.013,0.009 -0.013,-0.013
GND on Ground 2 "NONET_L-01_P-001" (solid, pour order 3): 0.013,-0.013 0.013,38.72 47.523,38.72 47.523,-0.013 47.6,-0.013
GND on Top Layer "NONET_L-01_P-001" (solid, remove dead copper, pour order 1): -0.051,-0.165 -0.051,38.606 47.536,38.606 47.536,-0.102

## Other copper
Top Layer:
  pour cut-out: 47.078,0.17 47.083,0.175 47.083,11.849 36.415,11.849 36.415,0.165
  text "b" at 37.329,1.715 h9.65

## Silkscreen, mask and mechanical layers (free items; w line width, h text height)
Top Overlay:
  lines w0.15: -1.05,29.45 17.2,29.45 ; -1,12.7 2.1,12.7 ; 19.35,29.5 19.85,29.5 ; 19.733,28.033 20,28.3 ; 19.75,31.05 20,30.8 ; 21.4,-0.7 21.4,0.8 ; 23.3,11.7 22.6,12.4 ; 37.7,40.4 37.7,32.9 36.3,31.5 ; 49.1,25.5 37.4,25.5 36.3,26.6 36.3,31.5 ; 2.1,12.7 2.1,12.7 ; 2.1,12.7 22.1,12.7 22.3,12.7 22.6,12.4 ; 21.4,0.8 21.4,0.8 ; 21.4,0.8 21.4,4.5 23.3,6.4 23.3,24.1 22.4,25 18.1,25 17.2,25.9 17.2,32.8 17.6,33.2 34.6,33.2 36.3,31.5 ; 22.6,12.4 22.6,12.4 ; 36.3,31.5 36.3,31.5 ; 19.5,15.25 19.5,15.25
  lines w0.203: 54.918,14.646 64.417,14.646
  lines w0.254: 5.939,26.026 cw(c7.089,25.536) 8.203,26.104 ; 7.75,26 8.25,26 8.25,26.607 ; 21.1,31.75 21.35,32 ; 21.1,32.25 21.35,32 ; 21.35,26.975 cw(c21.35,29.488) 21.35,32
  text "SEGGER" at 2.354,36.554 h1
  text "EXTERNAL" at 38.654,36.454 h1
  text "20-PIN" at 2.307,34.921 h1
  text "GND" at 39.5,30.6 h0.8
  text "USB" at 24.754,30.554 h1
  text "MODE" at 28.554,30.554 h1
  text "UFP" at 20.427,30.377 h0.81
  text "OPEN" at 20.427,29.127 h0.81
  text "VBUS" at 38.7,28.1 h0.8
  text "DFP" at 20.427,27.877 h0.81
  text "VREF ADJUST" at 2.254,27.454 h1
  text "4.5V" at 2.377,25.627 h0.81
  text "1.2V" at 8.877,25.627 h0.81
  text "1" at 16.289,22.7 h0.8
  text "V_LDO" at 17.7,22.683 h0.8
  text "2" at 15.95,20.931 h0.8
  text "V_REF" at 17.7,20.933 h0.8
  text "3" at 15.95,18.95 h0.8
  text "V_SEG" at 17.7,18.933 h0.8
  text "SHORT 1 & 2" at 55.019,16.398 h0.89
  text "FOR SEGGER 5V" at 54.867,15.154 h0.76
  text "1" at 13.004,13.504 h1.02
  text "2" at 15.504,13.504 h1.02
  text "3" at 18.004,13.504 h1.02
  text "SHORT 2 & 3" at 55.146,13.046 h0.86
  text "POT-CONTROLLED V" at 55.553,11.776 h0.56
  text "SBU ALT. FUNCTION" at 3.004,11.004 h1
  text "UART" at 8.7,8.45 h0.8
  text "RX" at 3.2,8.2 h0.8
  text "TX" at 15.45,8.2 h0.8
  text "SBU" at 8.95,5.95 h0.8
  text "2" at 4.2,5.7 h0.8
  text "1" at 15.7,5.7 h0.8
  text "SWD/" at 8.7,3.7 h0.8
  text "IO/MS" at 15.7,3.2 h0.8
  text "CLK" at 2.45,2.95 h0.8
  text "JTAG" at 8.7,2.45 h0.8
  text "c" at 36.713,1.365 h10.16
Board Outline:
  the board outline again, w0.254